# Altium PCB ESP07.PcbDoc
Units mm, origin at the board's own origin, x right, y up, seen from the top; angles counter-clockwise.
Board outline 27.7 x 25.83 mm, 2 copper layers (Top Layer, Bottom Layer); 4 components, 16 nets, 34 pads, 0 vias.
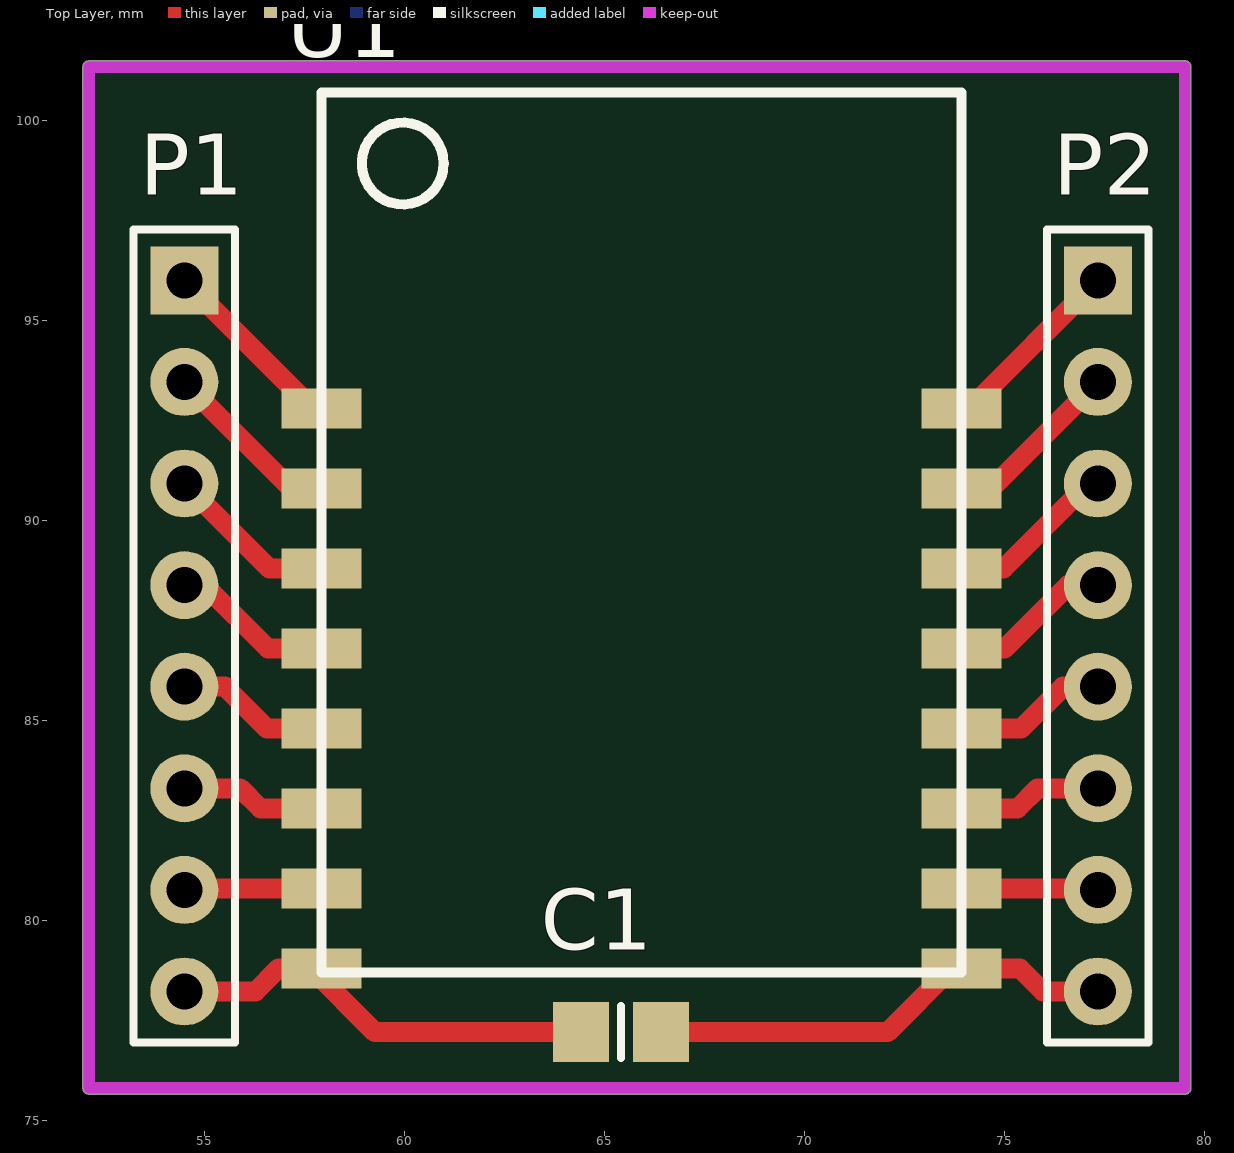
[diagram p0: Top Layer view]
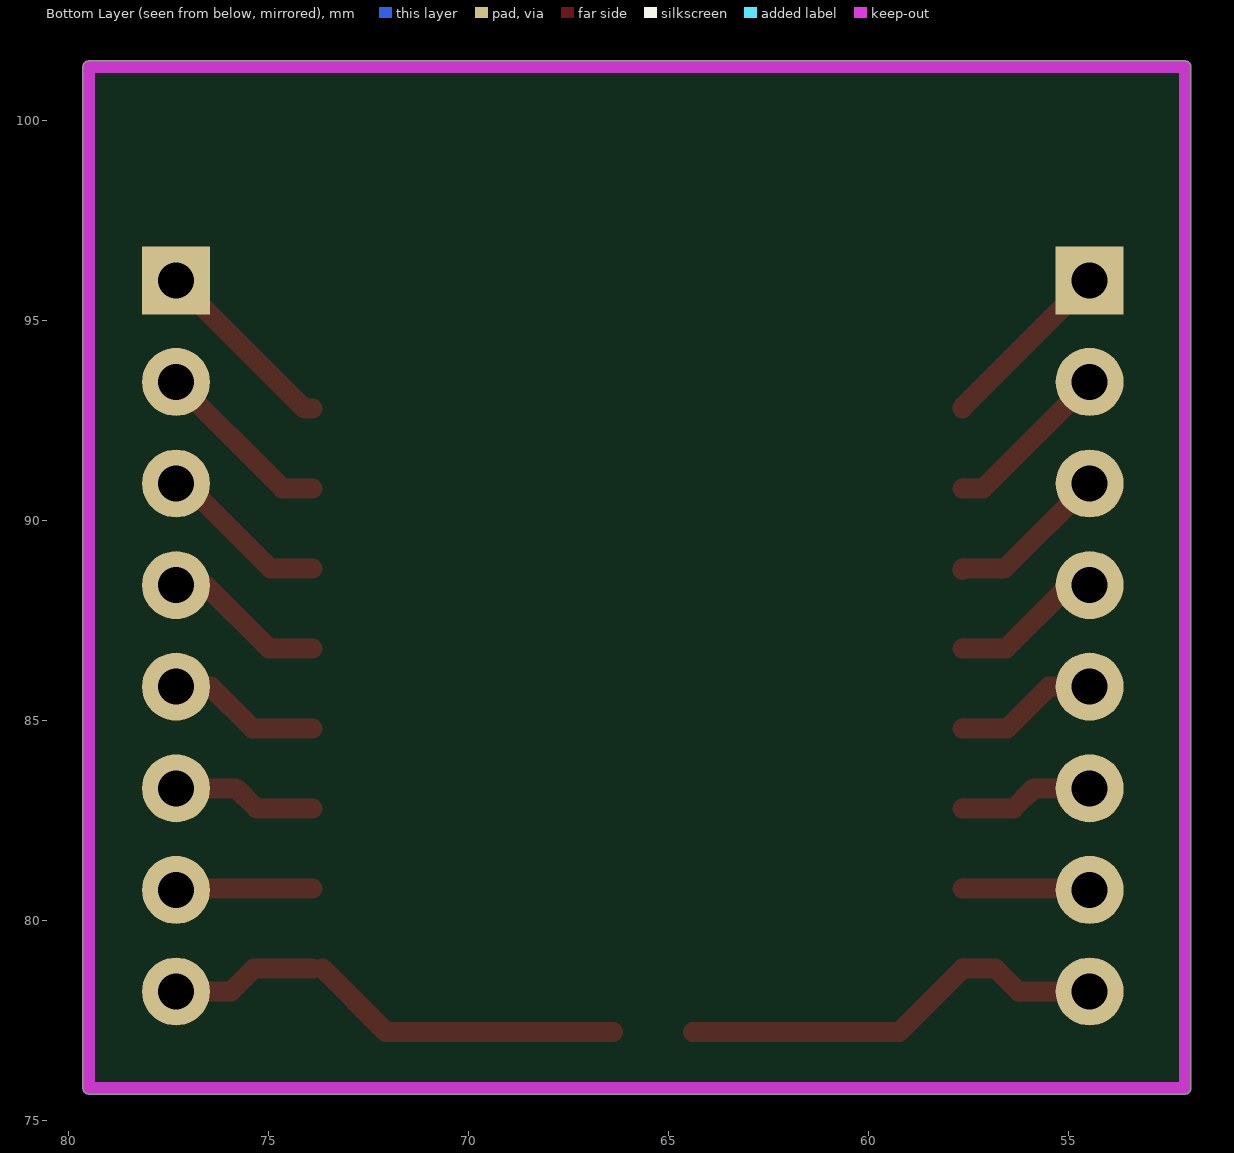
[diagram p1: Bottom Layer view, seen from below]

## Layer stack, top to bottom
Top Solder: solder mask 0.0102, Solder Resist, Dk 3.5
Top Layer: signal copper 0.0356
Dielectric 1: dielectric 0.32, FR-4, Dk 4.8
Bottom Layer: signal copper 0.0356
Bottom Solder: solder mask 0.0102, Solder Resist, Dk 3.5

## Board outline
52.1,75.669 cw(c52.1,75.819) 51.95,75.819 51.95,101.346 cw(c52.1,101.346) 52.1,101.496 79.5,101.496 cw(c79.5,101.346) 79.65,101.346 79.65,75.819 cw(c79.5,75.819) 79.5,75.669

## Design rules (kind name [scope] priority, off if disabled: settings)
Clearance [All] p1: gap=0.3
PolygonConnect [All] p1: connectstyle=Relief reliefconductorwidth=0.254 reliefentries=4 polygonreliefangle="90 Angle" airgapwidth=0.254
RoutingVias [All] p1: holewidth=0.6 width=1 viastyle="Through Hole" minholewidth=0.711 minwidth=1.27 maxholewidth=0.711 maxwidth=1.27
SolderMaskExpansion [All] p1: expansion=0.102
Width [All] p1: maxlimit=0.5 minlimit=0.3 preferedwidth=0.3
29 further rules are at their usual default settings.

## Components (designator, comment, footprint, x,y, rotation, side; value= is the part's Value field where it differs from the comment)
C1 "Cap" 6-0805_M 65.405,77.216 r180 top
P1 "Header 8" HDR1X8 54.483,96.012 r270 top
P2 "Header 8" HDR1X8 77.323,96.012 r270 top
U1 "ESP07" ESP07 57.912,90.805 r0 top

## Footprints (in the part's own frame and the unit in brackets; to place one, negate y for a bottom-side part, rotate by r counter-clockwise, add the part's x,y. Pads: shape width x height; smd on the part's side, far side on the other; paste and mask are expansions set on the pad)
6-0805_M [mm] "Chip Resistor, Body 2.0x1.2mm, IPC Low Density"
  rect 1.4x1.5 smd: 1(-1,0) 2(1,0)
  silkscreen extent 0,-0.65 0,0.65, body extent -1.07,-0.7 1.07,0.7, height 0.7
ESP07 [mm]
  rect 2x1 smd: 1(0,2) 2(0,0) 3(0,-2) 4(0,-4) 5(0,-6) 6(0,-8) 7(0,-10) 8(0,-12) 9(16,2) 10(16,0) 11(16,-2) 12(16,-4) 13(16,-6) 14(16,-8) 15(16,-10) 16(16,-12)
  silkscreen extent 0,-12.09 16,9.91
HDR1X8 [mm] "Connector; Header; 8 Position"
  rect 1.7x1.7 hole 0.9: 1(0,0)
  round 1.7 hole 0.9: 2(2.54,0) 3(5.08,0) 4(7.62,0) 5(10.16,0) 6(12.7,0) 7(15.24,0) 8(17.78,0)
  silkscreen extent -1.27,-1.27 19.05,1.27

## Part data
C1: "Capacitor"
P1 P2: "Header, 8-Pin"
U1: "ESP8266"

## Nets (pads, with @x,y where several pads share a name; then routed paths per layer and width w, separated by ;. In a path a pad name is that pad's centre, name@x,y a point inside that pad or via, vN(x,y) a via of type N, cw(c..) or ccw(c..) an arc to the next point about the centre after c; other vN are vias at no path point)
ADC: P1.2 U1.2 | length 4.3
  Top Layer w0.5: P1.2 57.15,90.805 U1.2@57.658,90.805
CH_PD: P1.3 U1.3 | length 4.1
  Top Layer w0.5: P1.3 56.61,88.805 57.658,88.805 U1.3@57.658,88.773
GND: C1.1 P2.8 U1.16 | length 11.6
  Top Layer w0.5: C1.1 72.069,77.216 U1.16@73.658,78.805 ; U1.16 75.376,78.805 75.949,78.232 P2.8
GPIO0: P2.5 U1.13 | length 3.8
  Top Layer w0.5: U1.13 75.407,84.805 76.454,85.852 P2.5
GPIO2: P2.6 U1.14 | length 3.6
  Top Layer w0.5: U1.14 75.312,82.805 75.819,83.312 P2.6
GPIO4: P2.3 U1.11 | length 4.3
  Top Layer w0.5: U1.11 74.962,88.805 77.089,90.932 P2.3
GPIO5: P2.4 U1.12 | length 4.1
  Top Layer w0.5: U1.12 74.994,86.805 76.581,88.392 P2.4
GPIO12: P1.6 U1.6 | length 3.4
  Top Layer w0.5: P1.6 55.88,83.312 56.387,82.805 U1.6@57.658,82.805
GPIO13: P1.7 U1.7 | length 3.2
  Top Layer w0.5: P1.7 54.516,80.805 U1.7@57.658,80.805
GPIO14: P1.5 U1.5 | length 3.6
  Top Layer w0.5: P1.5 55.499,85.852 56.546,84.805 U1.5@57.658,84.805
GPIO15: P2.7 U1.15 | length 3.4
  Top Layer w0.5: U1.15 77.29,80.805 P2.7
GPIO16: P1.4 U1.4 | length 3.8
  Top Layer w0.5: P1.4 54.991,88.392 56.578,86.805 U1.4@57.658,86.805
REST: P1.1 U1.1 | length 4.5
  Top Layer w0.5: P1.1 57.658,92.837 U1.1@57.658,92.805
RX: P2.2 U1.10 | length 4.5
  Top Layer w0.5: U1.10 74.656,90.805 P2.2
TX: P2.1 U1.9 | length 4.7
  Top Layer w0.5: U1.9 74.116,92.805 P2.1
VCC: C1.2 P1.8 U1.8 | length 10.8
  Top Layer w0.5: P1.8 56.261,78.232 56.834,78.805 57.658,78.805 59.247,77.216 C1.2

## Keep-outs
Keep-Out Layer:
  lines w0.3: 52.1,75.819 79.5,75.819 79.5,101.346 52.1,101.346 52.1,75.819